# Altium PCB mega_shield.PcbDoc
Units mil, origin at the board's own origin, x right, y up, seen from the top; angles counter-clockwise.
Board outline 4000 x 2100 mil, 4 copper layers (Top Layer, Layer 1, Layer 2, Bottom Layer), stack 23.756 mil thick; 16 components, 0 nets, 151 pads, 3 vias.
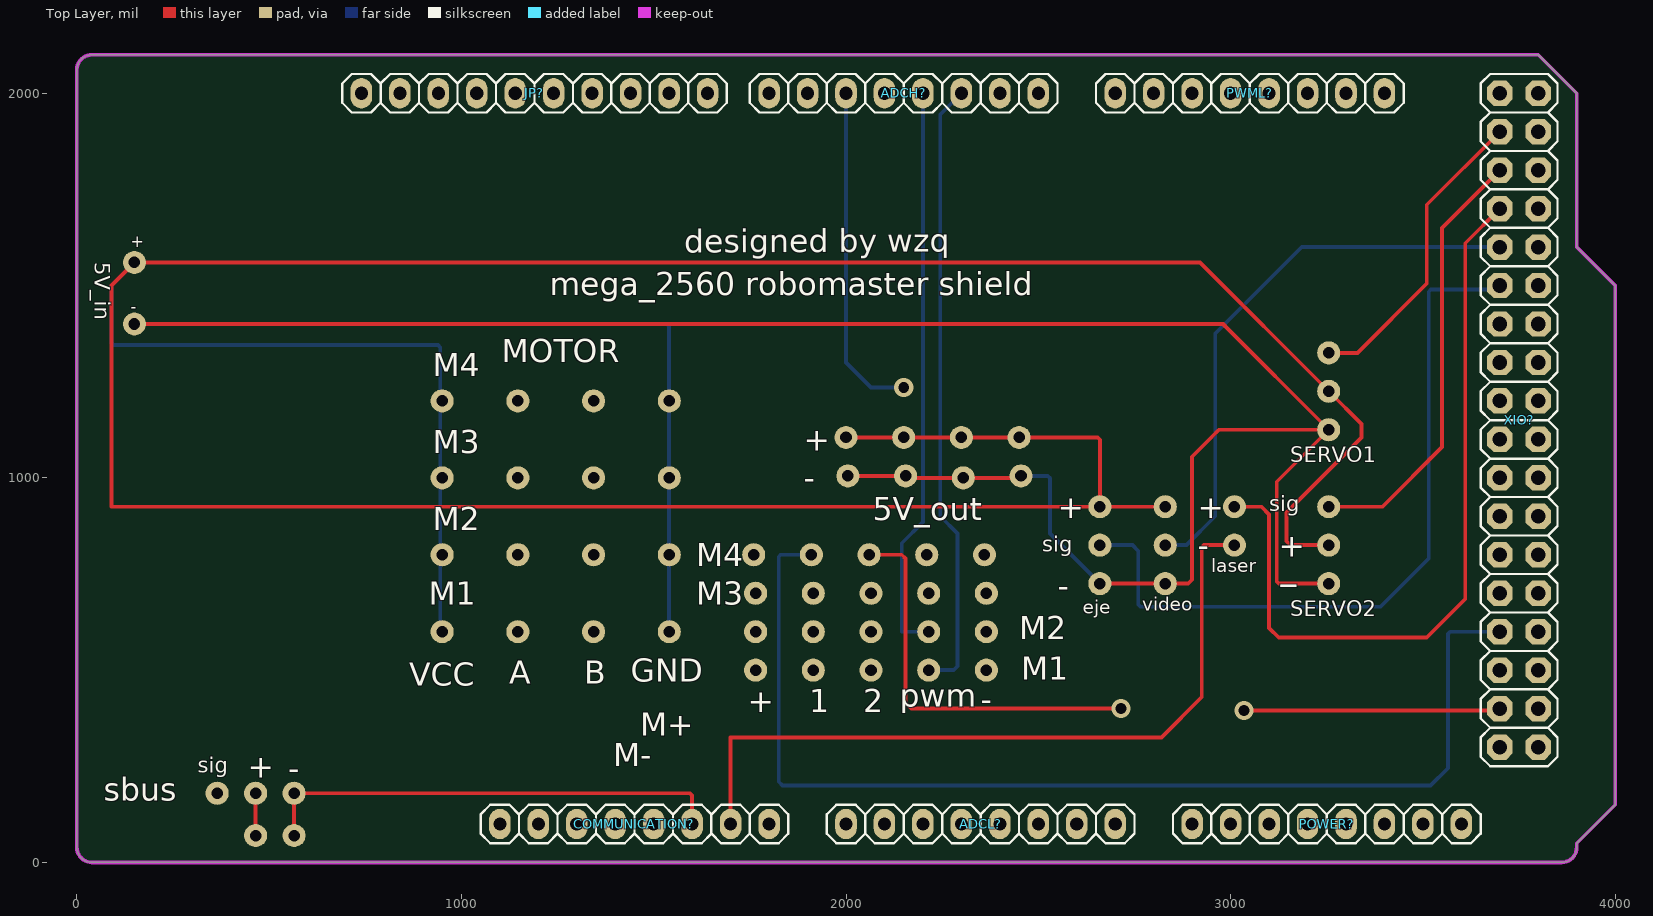
[diagram p0: Top Layer view]
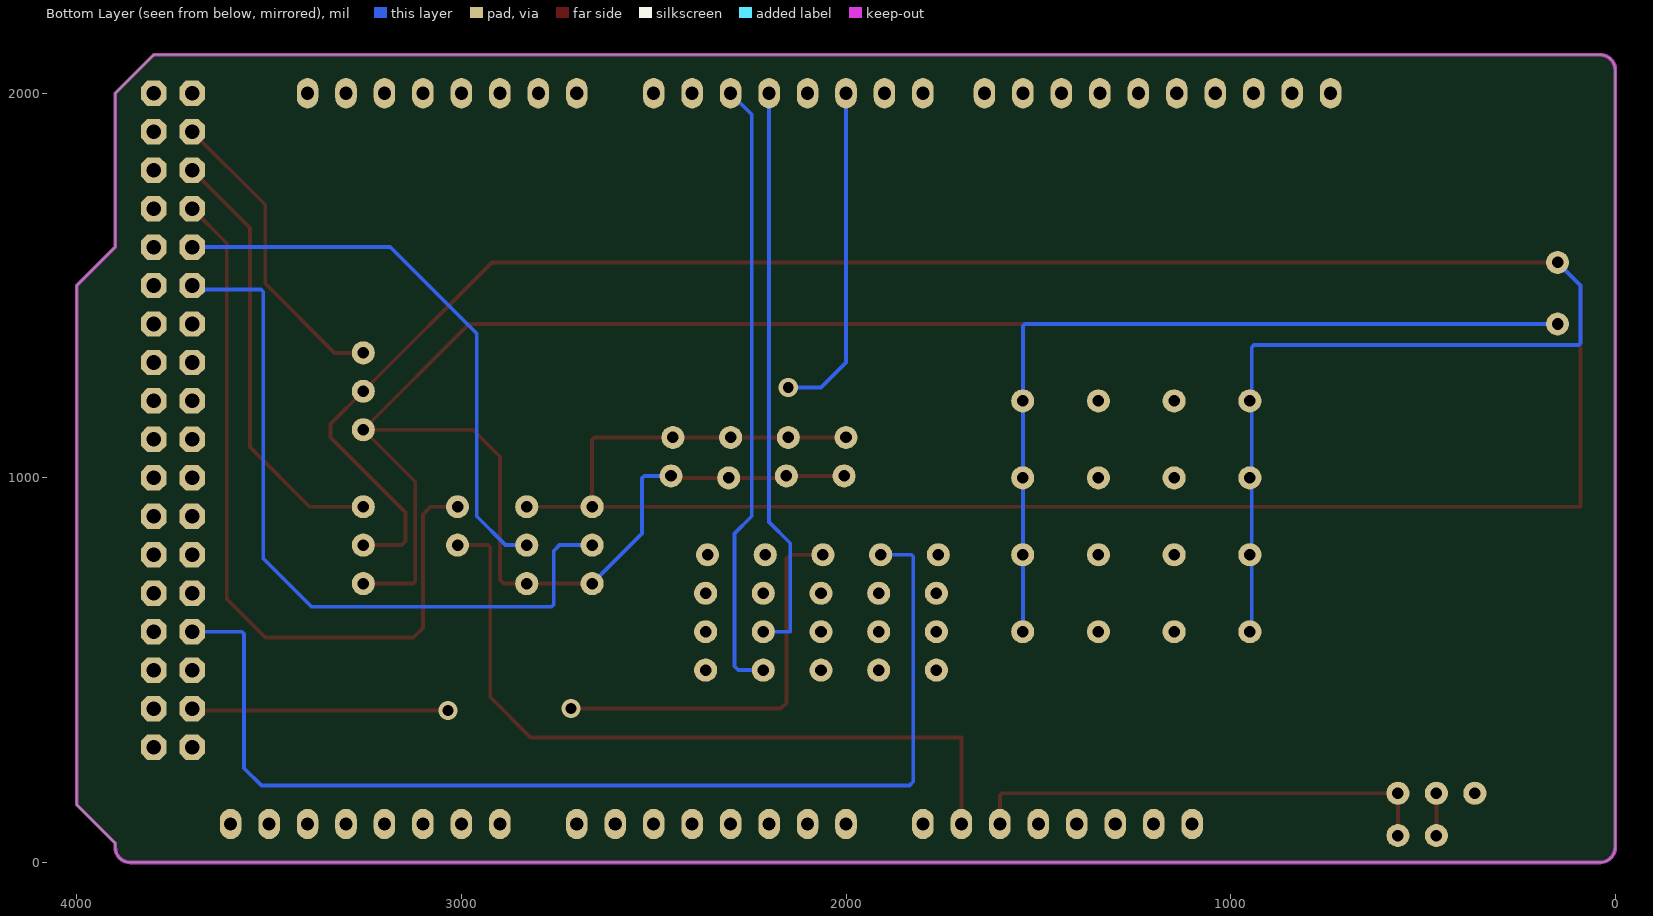
[diagram p1: Bottom Layer view, seen from below]
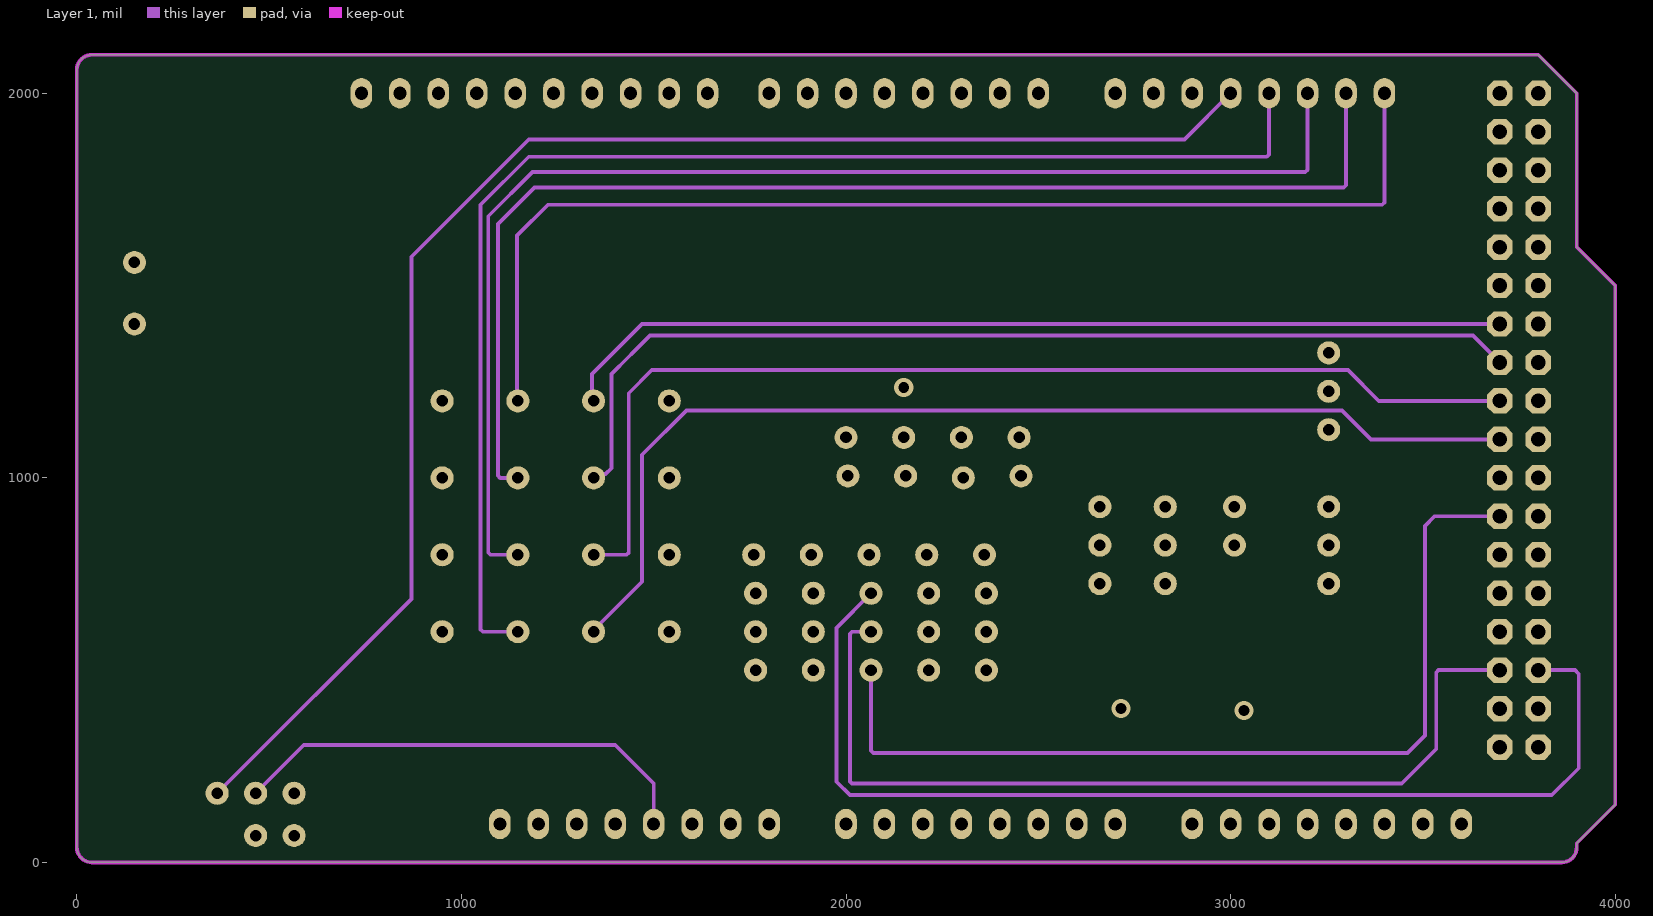
[diagram p2: Layer 1]
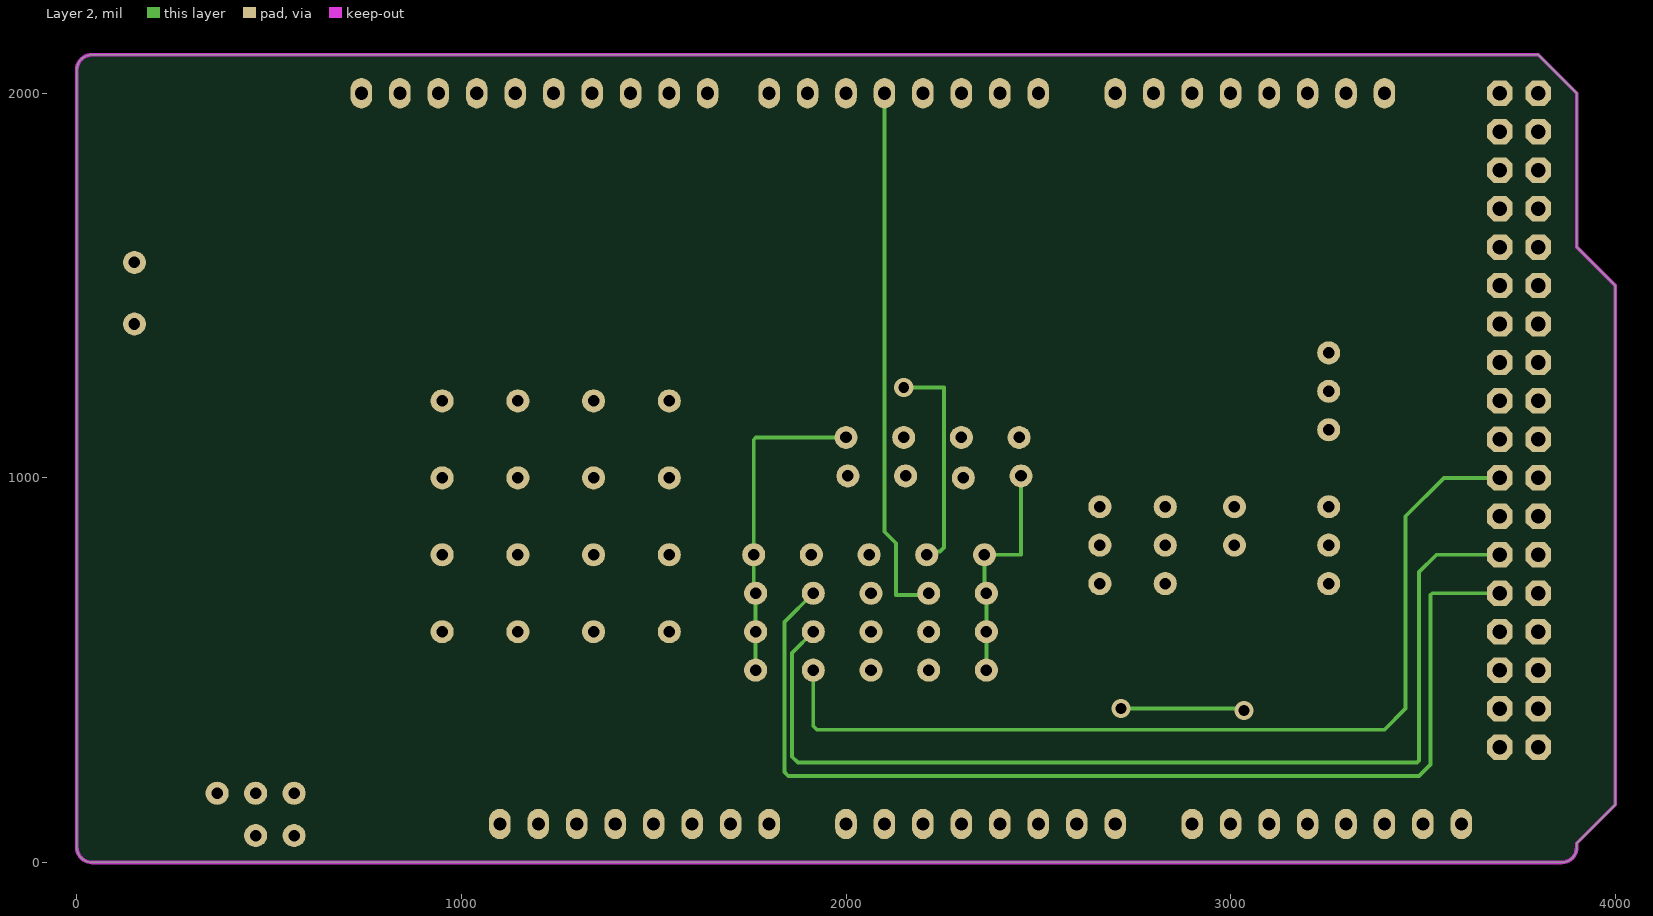
[diagram p3: Layer 2]

## Layer stack, top to bottom
Top Solder: solder mask 0.4, Solder Resist, Dk 3.5
Top Layer: signal copper 1.4
Dielectric 2: prepreg 2.8, PP-006, Dk 4.1
Layer 1: signal copper 1.378
Dielectric 1: dielectric 12.6, FR-4, Dk 4.8
Layer 2: signal copper 1.378
Dielectric 3: prepreg 2.8, PP-006, Dk 4.1
Bottom Layer: signal copper 1.4
Bottom Solder: solder mask 0.4, Solder Resist, Dk 3.5

## Board outline
0,40 0,2061 cw(c39.5,2060.5) 40,2100 3800,2100 3900,2000 3900,1600 4000,1500 4000,150 3900,50 3900,40 cw(c3860.5,39.5) 3861,0 40,0 cw(c40,40)

## Design rules (kind name [scope] priority, off if disabled: settings)
Clearance [All] p1: gap=10 ignorepadtopadclearanceinfootprint=FALSE except(0: Arc-Hole Track-Hole SMDPad-Hole THPad-Hole Via-Hole Fill-Hole Poly-Hole Region-Hole Text-Hole)
PolygonConnect [All] p1: connectstyle=Relief reliefconductorwidth=10 reliefentries=4 polygonreliefangle="90 Angle" airgapwidth=10
RoomDefinition mega_shield [InComponentClass('mega_shield')] p1: confinementstyle=ConfineIn formatcopy=TRUE lockcomponents=FALSE outline -2055,-2175 -55,-2175 -55,-1175 -2055,-1175
RoutingVias [All] p1: holewidth=28 width=50 viastyle="Through Hole" minholewidth=28 minwidth=50 maxholewidth=28 maxwidth=50
SolderMaskExpansion [All] p1: expansion=4 istentingtop=FALSE
Width [All] p1: maxlimit=10 minlimit=10 preferedwidth=10
30 further rules are at their usual default settings.

## Classes and differential pairs
component class mega_shield: ADCH? ADCL? COMMUNICATION? JP? M1 M2 M3 M4 POWER? PWML? sbus XIO?

## Components (designator, comment, footprint, x,y, rotation, side; value= is the part's Value field where it differs from the comment)
ADCH? "8x1F-H8.5" 1X08 2150,2000 r0 top locked
ADCL? "8x1F-H8.5" 1X08 2350,100 r0 top locked
COMMUNICATION? "8x1F-H8.5" 1X08 1450,100 r0 top locked
JP? "10x1F-H8.5" 1X10 1190,2000 r0 top locked
M1 "board" PCBComponent_1 1765,500 r0 top
M1 "Component_1" PCBComponent_2 950,600 r0 top
M2 "board" PCBComponent_1 1765,600 r0 top
M2 "Component_1" PCBComponent_2 950,800 r0 top
M3 "board" PCBComponent_1 1765,700 r0 top
M3 "Component_1" PCBComponent_2 950,1000 r0 top
M4 "board" PCBComponent_1 1760,800 r0 top
M4 "Component_1" PCBComponent_2 950,1200 r0 top
POWER? "8x1F-H8.5" 1X08 3250,100 r0 top locked
PWML? "8x1F-H8.5" 1X08 3050,2000 r180 top locked
sbus "Component_1" pin_3 365,180 r0 top
XIO? "18x2F-H8.5" 2X18 3750,1150 r90 top locked

## Footprints (in the part's own frame and the unit in brackets; to place one, negate y for a bottom-side part, rotate by r counter-clockwise, add the part's x,y. Pads: shape width x height; smd on the part's side, far side on the other; paste and mask are expansions set on the pad)
1X08 [mil] "1X08"
  oval 56x78.74 hole 34: 1(-350,0) 2(-250,0) 3(-150,0) 4(-50,0) 5(50,0) 6(150,0) 7(250,0) 8(350,0)
  silkscreen extent -400,-50 400,50
1X10 [mil] "1X10"
  oval 56x78.74 hole 34: 1(-450,0) 2(-350,0) 3(-250,0) 4(-150,0) 5(-50,0) 6(50,0) 7(150,0) 8(250,0) 9(350,0) 10(450,0)
  silkscreen extent -500,-50 500,50
2X18 [mil] "2X18"
  oct 66x66 hole 38: 1(-850,-50) 2(-850,50) 3(-750,-50) 4(-750,50) 5(-650,-50) 6(-650,50) 7(-550,-50) 8(-550,50) 9(-450,-50) 10(-450,50) 11(-350,-50) 12(-350,50) 13(-250,-50) 14(-250,50) 15(-150,-50) 16(-150,50) 17(-50,-50) 18(-50,50) 19(50,-50) 20(50,50) 21(150,-50) 22(150,50) 23(250,-50) 24(250,50) 25(350,-50) 26(350,50) 27(450,-50) 28(450,50) 29(550,-50) 30(550,50) 31(650,-50) 32(650,50) 33(750,-50) 34(750,50) 35(850,-50) 36(850,50)
  silkscreen extent -900,-100 900,100
PCBComponent_1 [mil]
  round 60 hole 30: 26(0,0) 27(150,0) 28(300,0) 29(450,0) 30(600,0)
PCBComponent_2 [mil]
  round 60 hole 30: 24(0,0) 25(196.85,0) 26(393.7,0) 27(590.55,0)
pin_3 [mil]
  round 60 hole 30: 32(0,0) 33(100,0) 34(200,0)

## Part data
ADCH? ADCL? COMMUNICATION? POWER? PWML?: library part PINHD-1X8, "<b>PIN HEADER</b>"
JP?: library part PINHD-1X10_ARD, "<b>PIN HEADER</b>"
M1 M2 M3 M4: library part Component_1
XIO?: library part PINHD-2X18, "<b>PIN HEADER</b>"

## Free pads (board coordinates)
  round 60 hole 30: 1(3010,925) 1(3255,925) 1(3255,1325) 2(3010,825) 2(3255,825) 2(3255,1225) 3(3255,725) 3(3255,1125) 4(150,1560) 5(150,1400) 8(2830,925) 9(2830,825) 10(2830,725) 15(2660,925) 16(2660,825) 17(2660,725) 18(2455,1005) 19(2450,1105) 20(2300,1105) 21(2305,1000) 22(2155,1005) 23(2150,1105) 24(2005,1005) 25(2000,1105) 26(465,70) 27(565,70)

## Via types
v1: diameter 50, hole 28, Top Layer to Bottom Layer, 3 vias

## Nets (pads, with @x,y where several pads share a name; then routed paths per layer and width w, separated by ;. In a path a pad name is that pad's centre, name@x,y a point inside that pad or via, vN(x,y) a via of type N, cw(c..) or ccw(c..) an arc to the next point about the centre after c; other vN are vias at no path point)
pads on no net: ADCH?.1 ADCH?.2 ADCH?.3 ADCH?.4 ADCH?.5 ADCH?.6 ADCH?.7 ADCH?.8 ADCL?.1 ADCL?.2 ADCL?.3 ADCL?.4 ADCL?.5 ADCL?.6 ADCL?.7 ADCL?.8 COMMUNICATION?.1 COMMUNICATION?.2 COMMUNICATION?.3 COMMUNICATION?.4 COMMUNICATION?.5 COMMUNICATION?.6 COMMUNICATION?.7 COMMUNICATION?.8 JP?.1 JP?.2 JP?.3 JP?.4 JP?.5 JP?.6 JP?.7 JP?.8 JP?.9 JP?.10 M1.24 M1.25 M1.26 M1.27 M1.28 M1.29 M1.30 M2.24 M2.25 M2.26 M2.27 M2.28 M2.29 M2.30 M3.24 M3.25 M3.26 M3.27 M3.28 M3.29 M3.30 M4.24 M4.25 M4.26 M4.27 M4.28 M4.29 M4.30 POWER?.1 POWER?.2 POWER?.3 POWER?.4 POWER?.5 POWER?.6 POWER?.7 POWER?.8 PWML?.1 PWML?.2 PWML?.3 PWML?.4 PWML?.5 PWML?.6 PWML?.7 PWML?.8 sbus.32 sbus.33 sbus.34 XIO?.1 XIO?.2 XIO?.3 XIO?.4 XIO?.5 XIO?.6 XIO?.7 XIO?.8 XIO?.9 XIO?.10 XIO?.11 XIO?.12 XIO?.13 XIO?.14 XIO?.15 XIO?.16 XIO?.17 XIO?.18 XIO?.19 XIO?.20 XIO?.21 XIO?.22 XIO?.23 XIO?.24 XIO?.25 XIO?.26 XIO?.27 XIO?.28 XIO?.29 XIO?.30 XIO?.31 XIO?.32 XIO?.33 XIO?.34 XIO?.35 XIO?.36
copper on no net: | length 85468.9
  Top Layer w10: 150,1400 2770,1400 2980,1400 3255,1125 ; 465,70 465,180 ; 565,70 565,180 1594.14,180 1600,174.14 1600,100 ; 1700,100 1700,325 2820,325 2925,430 2925,819.14 2930.86,825 3010,825 ; 2000,1105 2150,1105 2300,1105 2450,1105 2654.14,1105 2660,1099.14 2660,925 ; 2005,1005 2155,1005 2160,1000 2305,1000 2450,1000 ; 2060,800 2145,800 2155,790 2155,415 2170,400 v1@2725,400 ; 2660,725 2830,725 2890,725 2900,735 2900,1055 2970,1125 3255,1125 ; 2660.03,925 2560,925 ; 2830,925 2660,925 ; 3010,925 3080,925 3100,905 3100,610 3125,585 3510,585 3610,685 3610,1610 3700,1700 ; v1(3035,395) 3695,395 3700,400 ; 3255,725 3125.86,725 3120,730.86 3120,990 3255,1125 ; 3255,825 3155,825 3145,835 3145,910 3340,1105 3340,1140 3255,1225 2920,1560 150,1560 90,1500 90,925 2560,925 ; 3255,925 3395,925 3550,1080 3550,1650 3700,1800 ; 3255,1325 3330,1325 3510,1505 3510,1710 3700,1900 ; 2560,925 2660,925
  Layer 1 w10: 365,180 870,685 870,880 870,1575 1175,1880 2880,1880 3000,2000 ; 465,180 590,305 1400,305 1500,205 1500,100 ; 1145,600 1055.86,600 1050,605.86 1050,1710 1175,1835 3094.14,1835 3100,1840.86 3100,2000 ; 1145,800 1075.86,800 1070,805.86 1070,1680 1185,1795 3194.14,1795 3200,1800.86 3200,2000 ; 1145,1000 1100.86,1000 1095,1005.86 1095,1660 1190,1755 3294.14,1755 3300,1760.86 3300,2000 ; 1145,1200 1145,1630 1225,1710 3394.14,1710 3400,1715.86 3400,2000 ; 1340,600 1470,730 1470,1060 1585,1175 3290,1175 3365,1100 3700,1100 ; 1340,800 1429.14,800 1435,805.86 ; 1340,1200 1340,1270 1470,1400 3700,1400 ; 1340.55,1000 1350.12,1009.57 1374.57,1009.57 1390,1025 1390,1270 1435,1315 1445,1325 1450.01,1330.01 1490,1370 3210,1370 3630,1370 3700,1300 ; 1435,805 1435,1220 1495,1280 3305,1280 3385,1200 3700,1200 ; 1540.55,1194.45 1540.55,1200 1543.33,1197.22 ; 2065,479.23 2065,290.86 2070.86,285 3460,285 3505,330 3505,875 3530,900 3700,900 ; 2065,600 2015.86,600 2010,594.14 2010,210.86 2015.86,205 3445,205 3534.55,294.55 3534.55,494.14 3540.4,500 3700,500 ; 2065,700 1975,610 1975,210 2010,175 3835,175 3905,245 3905,490 3895,500 3800,500
  Layer 2 w10: 1765,500 1765,600 1765,700 1760,705 1760,800 1760,1099.14 1765.86,1105 2000,1105 ; 1860,535 1860,545 ; 1915,500 1915,355 1925,345 3400,345 3455,400 3455,900 3555,1000 3700,1000 ; 1915,600 1860,545 ; 1915,700 1840,625 1840,235 1850,225 3490,225 3520,255 3520,695.81 3524.19,700 3700,700 ; 2100,2000 2100,860 2130,830 2130,695 2210,695 ; v1(2150,1235) 2255,1235 2255,819.02 2244.81,808.83 2218.83,808.83 2210,800 ; 2365,500 2365,700 2360,705 2360,800 2455,800 2455,1005 ; v1(2715,400) v1@3030,400 ; 3700,800 3535,800 3490,755 3490,265 3485,260 1875,260 1860,275 1860,545
  Bottom Layer w10: 150,1560 90,1500 90,1350.86 95.86,1345 939.14,1345 945,1339.14 945,1200 945,1000 945,800 945,600 ; 150.4,1400.4 1530.4,1400.4 1534.14,1400.4 1540,1394.54 1540,1200 1540,1000 1540,800 1540,600 ; 1910,800 1830,800 1825,795 1825,210 1835,200 1860,200 3520,200 3565,245 3565,594.14 3570.86,600 3700,600 ; 2000,2000 2000,1300 2065,1235 v1(2150,1235) ; 2200,2000 2200,885 2145,830 2145,600 2215,600 ; 2215,500 2280,500 2290,510 2290,855 2245,900 2245,1945 2300,2000 ; 2455,1005 2524.14,1005 2530,999.14 2530,855 2660,725 ; 2660,825 2745,825 2760,810 2760,670.86 2765.86,665 3390,665 3515,790 3515,1483.79 3520.86,1489.64 3689.64,1489.64 3700,1500 ; 2830,825 2885,825 2960,900 2960,1375 3185,1600 3700,1600

## Polygon pours and split planes (outlines as drawn)
no net on Mechanical 1 (solid): -2055,1790

## Keep-outs
Keep-Out Layer:
  the board outline again, w10

## Silkscreen, mask and mechanical layers (free items; w line width, h text height)
Top Overlay:
  text "+" at 140,1600 h30
  text "designed by wzq" at 1580,1585 h60 r0.23
  text "5V_in" at 46.66,1560 h40 r270
  text "mega_2560 robomaster shield" at 1230,1474.99 h60
  text "-" at 140,1430 h30
  text "MOTOR" at 1105,1300 h60
  text "+" at 1890,1070 h60
  text "SERVO1" at 3155,1040 h40
  text "-" at 1890,970.01 h60
  text "sig" at 3100,913.33 h40
  text "+" at 2550,895 h60
  text "+" at 2915,895 h60
  text "5V_out" at 2070,890 h60
  text "sig" at 2510,808.33 h40
  text "-" at 2915,795.01 h60
  text "+" at 3125,795 h60
  text "laser" at 2950,755 h35
  text "_" at 3130,735 h60
  text "-" at 2550,690.01 h60
  text "video" at 2770,655 h35
  text "eje" at 2615,646.66 h35
  text "SERVO2" at 3155,640 h40
  text "GND" at 1440,470 h60
  text "A" at 1125,465 h60
  text "B" at 1320,465 h60
  text "VCC" at 865,460 h60
  text "pwm" at 2140,404.99 h60
  text "-" at 2350,395.01 h60
  text "+" at 1745,390 h60
  text "1" at 1905,390 h60
  text "2" at 2045,390 h60
  text "M+" at 1465,330 h60
  text "M-" at 1395,250 h60
  text "sig" at 315,233.33 h40
  text "+" at 445,220 h60
  text "-" at 550,215.01 h60